# EAGLE board wind_speed (EAGLE 6.3)
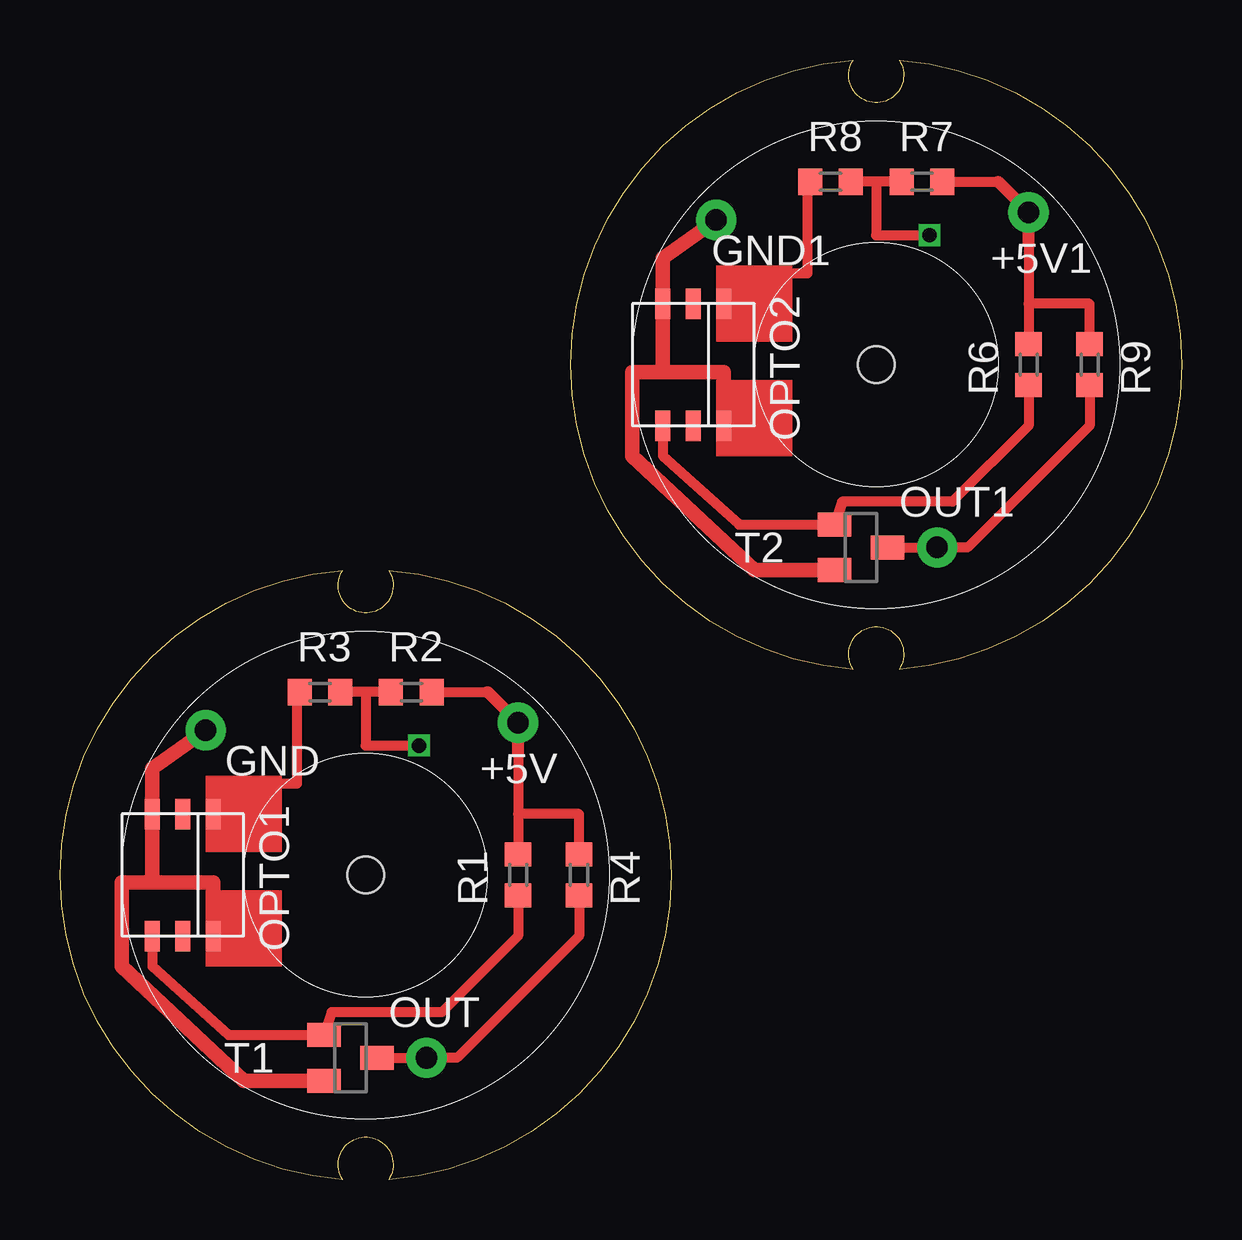
[diagram p0: board, top side]
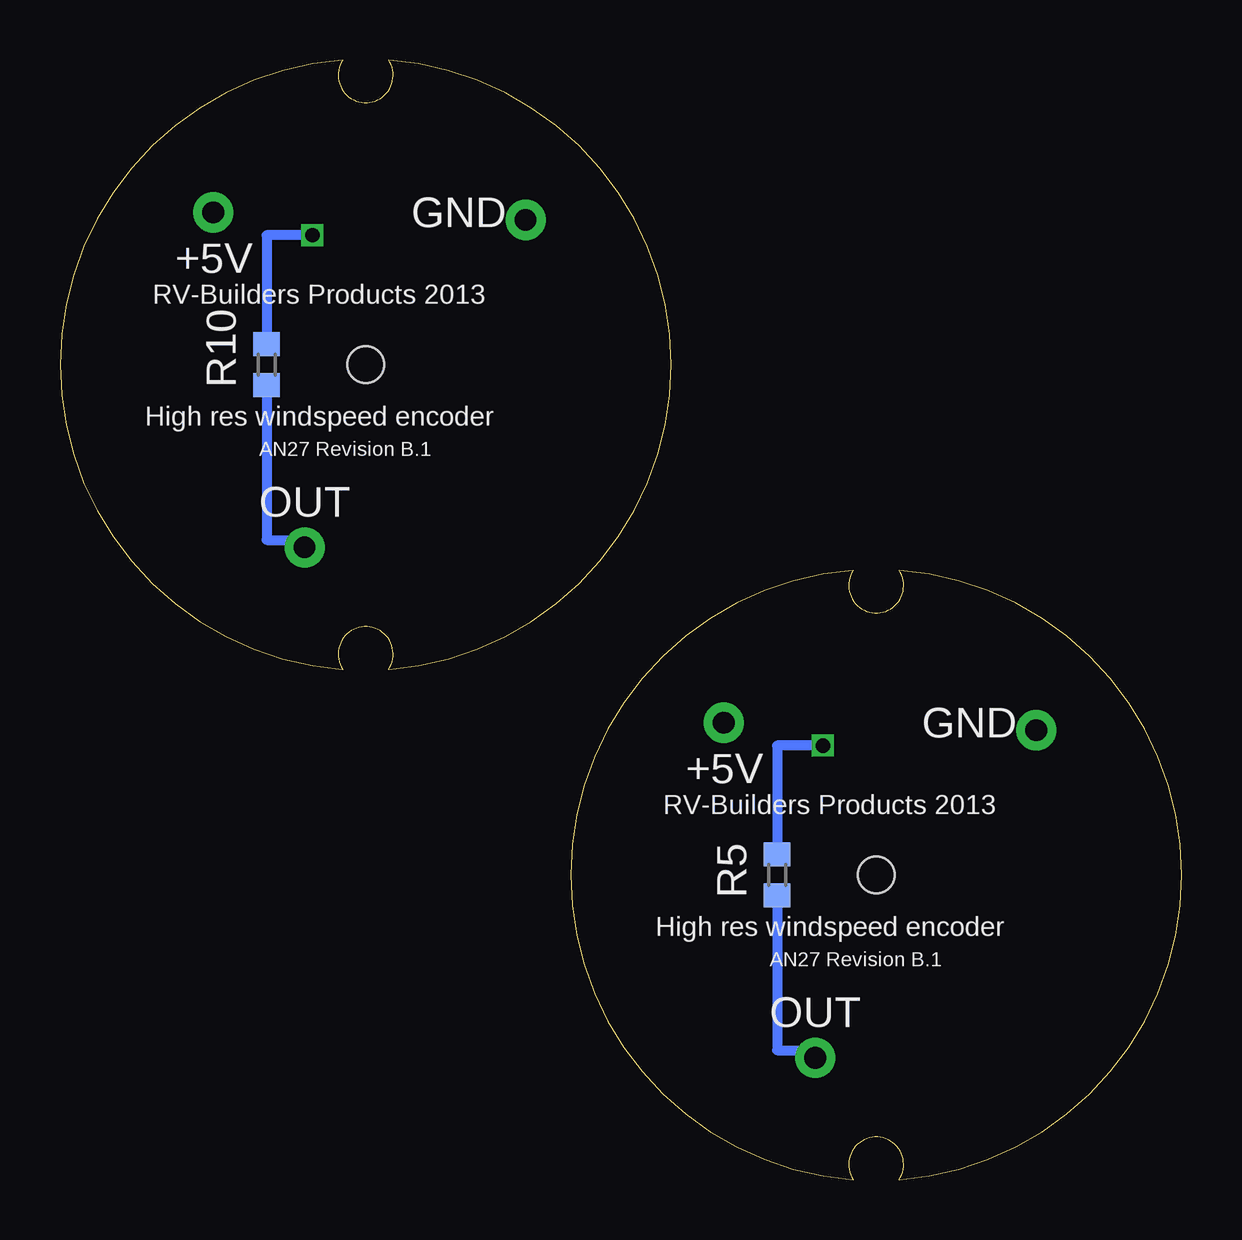
[diagram p1: board, bottom side, seen from below]

Size 46.74 x 46.67 mm. Coordinates in mm from the lower left corner, seen from the top.
Outline: 13.69,25.4 arc-171 13.69,0 arc247 11.78,0 arc-171 11.78,25.4 arc247 13.69,25.4
Outline: 34.96,46.67 arc-171 34.96,21.27 arc247 33.06,21.27 arc-171 33.06,46.67 arc247 34.96,46.67
Copper layers (1*16): Top 0.035mm / dielectric 1.5mm / Bottom 0.035mm
Design rules "Elecrow_2-layer_with reduced cream mask": minimum track width 6mil, minimum drill 12mil, track to track 6mil, track to pad 6mil, pad to pad 6mil, via to via 6mil, smd to smd 0mil, copper to edge 10mil, drill to drill 10mil, minimum pad ring 10mil, minimum via ring 6mil, stop-mask expansion 2mil, vias tented up to drill 100mil, thermal gap 10mil
Holes 1.52 mm at 12.74,12.7 34.01,33.97

## Footprints (pad centres in the part's own frame; a part is rotated, then mirrored left to right if it is on the bottom)
TP_SOL = drill 0.9 pad 1.676: P$1 0,0
OSRAM-6 = smd 0.635 x 1.27: P$1 0,-1.27; P$2 1.27,-1.27; P$3 2.54,-1.27; P$4 2.54,3.81; P$5 1.27,3.81; P$6 0,3.81
R0603 = smd 1 x 1.1: 1 -0.85,0; 2 0.85,0
SOT23 = smd 1 x 1.4: 1 -0.95,-1.1; 2 0.95,-1.1; 3 0,1.1

## Placement (x,y rotation side)
+5V  TPSOL  [TP_SOL]  19.09,19.05 0 top
+5V1  TPSOL  [TP_SOL]  40.36,40.32 0 top
GND  TPSOL  [TP_SOL]  6.07,18.73 0 top
GND1  TPSOL  [TP_SOL]  27.34,40 0 top
OPTO1  OSRAM_SHF9201  [OSRAM-6]  6.39,13.97 180 top
OPTO2  OSRAM_SHF9201  [OSRAM-6]  27.66,35.24 180 top
OUT  TPSOL  [TP_SOL]  15.28,5.08 0 top
OUT1  TPSOL  [TP_SOL]  36.55,26.35 0 top
R1  10K  [R0603]  19.09,12.7 90 top
R2  120o  [R0603]  14.64,20.32 0 top
R3  120o  [R0603]  10.83,20.32 0 top
R4  1K  [R0603]  21.63,12.7 90 top
R5  330  [R0603]  16.86,12.7 90 bottom
R6  10K  [R0603]  40.36,33.97 90 top
R7  120o  [R0603]  35.91,41.59 0 top
R8  120o  [R0603]  32.1,41.59 0 top
R9  1K  [R0603]  42.9,33.97 90 top
R10  330  [R0603]  38.14,33.97 90 bottom
T1  MMBT3904  [SOT23]  12.1,5.08 270 top
T2  MMBT3904  [SOT23]  33.37,26.35 270 top

## Library data of the parts
+5V +5V1 GND GND1 OPTO1 OPTO2 OUT OUT1 = wifi_WX
R1-R10 = rcl
T1 T2 = transistor

## Nets
N$1: OPTO1.P$4 R1.1 T1.1
N$2: GND.P$1 OPTO1.P$3 OPTO1.P$6 T1.2
N$3: +5V.P$1 R1.2 R2.2 R4.2
N$4: OUT.P$1 R4.1 R5.1 T1.3
N$5: OPTO1.P$1 R3.1
N$6: R2.1 R3.2 R5.2
N$7: OPTO2.P$4 R6.1 T2.1
N$8: GND1.P$1 OPTO2.P$3 OPTO2.P$6 T2.2
N$9: +5V1.P$1 R6.2 R7.2 R9.2
N$10: OUT1.P$1 R9.1 R10.1 T2.3
N$11: OPTO2.P$1 R8.1
N$12: R7.1 R8.2 R10.2

## Tracks (layer width: path | path; a pad name or v marks a point on that pad's centre or on a via)
N$1
  Top 0.406: R1.1 19.09,10.16 15.91,6.99 11.32,6.99 T1.1 7.02,6.03 3.85,8.89 OPTO1.P$4
N$2
  Top 0.61: 3.85,12.38 OPTO1.P$3 3.85,17.14 GND.P$1 | 3.85,12.38 6.39,12.38 OPTO1.P$6 | 3.85,12.38 2.58,12.38 2.58,8.89 7.65,4.13 T1.2
N$3
  Top 0.406: R2.2 17.82,20.32 | 19.09,17.78 19.09,15.24 | 19.09,15.24 R1.2 | R4.2 21.63,15.24 19.09,15.24
  Top 0.508: 17.82,20.32 +5V.P$1 19.09,17.78
N$4
  Top 0.406: T1.3 OUT.P$1 16.55,5.08 21.63,10.16 R4.1
  Bottom 0.406: R5.1 16.86,5.4 15.28,5.4 OUT.P$1
N$5
  Top 0.406: OPTO1.P$1 6.39,16.51 9.88,16.51 9.88,20.32 R3.1
N$6  (via drill 0.6)
  Top 0.406: R3.2 R2.1 12.74,20.32 12.74,18.1 v14.96,18.1
  Bottom 0.406: v14.96,18.1 16.86,18.1 R5.2
N$7
  Top 0.406: R6.1 40.36,31.43 37.18,28.26 32.59,28.26 T2.1 28.29,27.3 25.12,30.16 OPTO2.P$4
N$8
  Top 0.61: 25.12,33.65 OPTO2.P$3 25.12,38.42 GND1.P$1 | 25.12,33.65 27.66,33.65 OPTO2.P$6 | 25.12,33.65 23.85,33.65 23.85,30.16 28.93,25.4 T2.2
N$9
  Top 0.406: R7.2 39.09,41.59 | 40.36,39.05 40.36,36.51 | 40.36,36.51 R6.2 | R9.2 42.9,36.51 40.36,36.51
  Top 0.508: 39.09,41.59 +5V1.P$1 40.36,39.05
N$10
  Top 0.406: T2.3 OUT1.P$1 37.82,26.35 42.9,31.43 R9.1
  Bottom 0.406: R10.1 38.14,26.67 36.55,26.67 OUT1.P$1
N$11
  Top 0.406: OPTO2.P$1 27.66,37.78 31.15,37.78 31.15,41.59 R8.1
N$12  (via drill 0.6)
  Top 0.406: R8.2 R7.1 34.01,41.59 34.01,39.37 v36.23,39.37
  Bottom 0.406: v36.23,39.37 38.14,39.37 R10.2
(copper drawn outside any net)
  shapes: Top area x4

## Text on the board
bPlace: GND | +5V | RV-Builders Products 2013 | High res windspeed encoder | AN27 Revision B.1 | OUT | GND | +5V | RV-Builders Products 2013 | High res windspeed encoder | AN27 Revision B.1 | OUT